# Altium PCB Input.PcbDoc
Units mm, origin at the board's own origin, x right, y up, seen from the top; angles counter-clockwise.
Board outline 40 x 40 mm, 2 copper layers (Top Layer, Bottom Layer); 2 components, 3 nets, 15 pads, 0 vias.
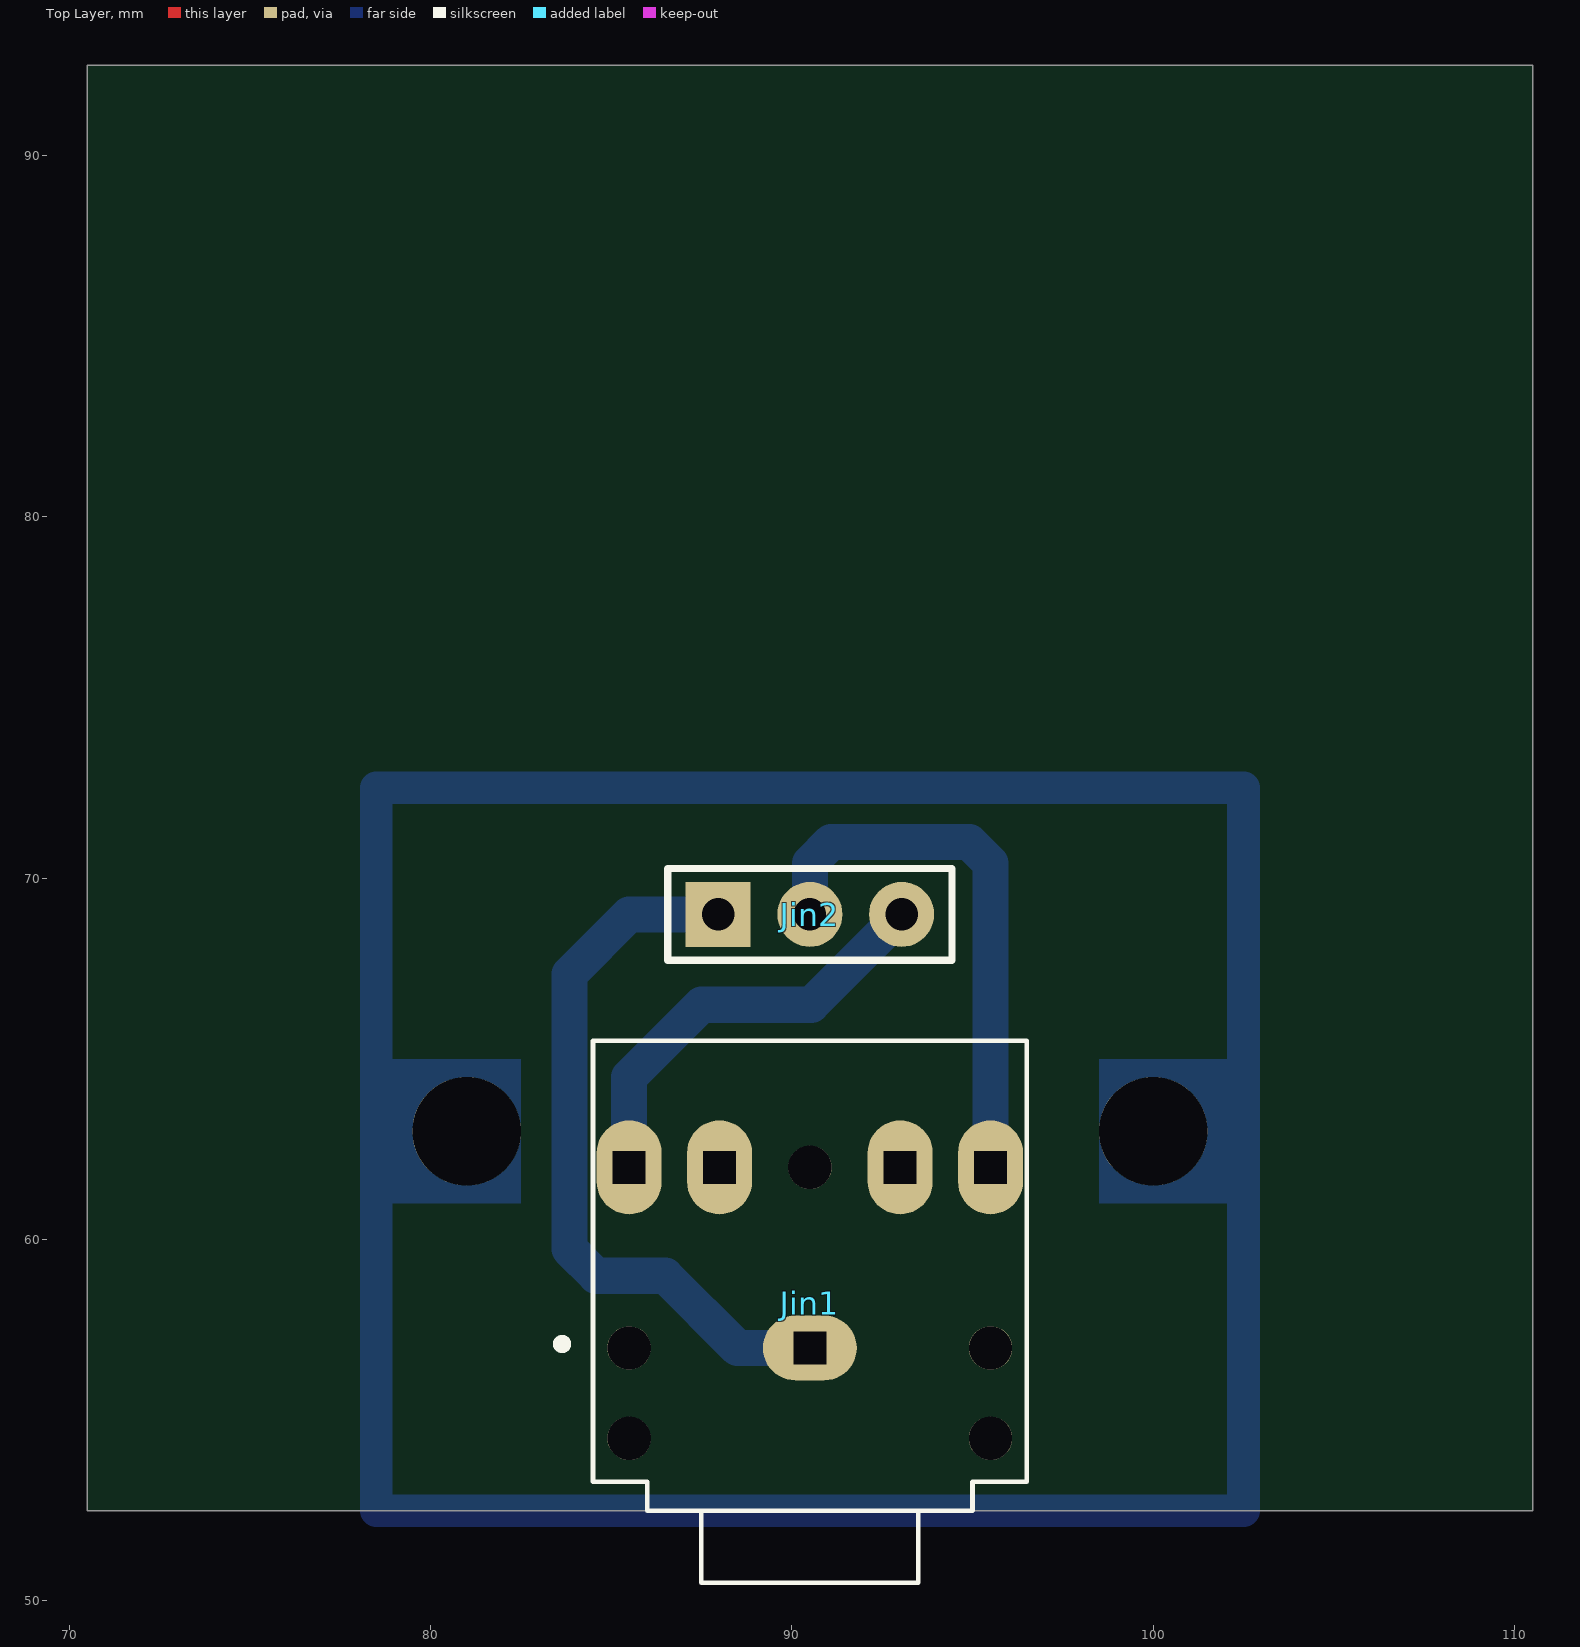
[diagram p0: Top Layer view]
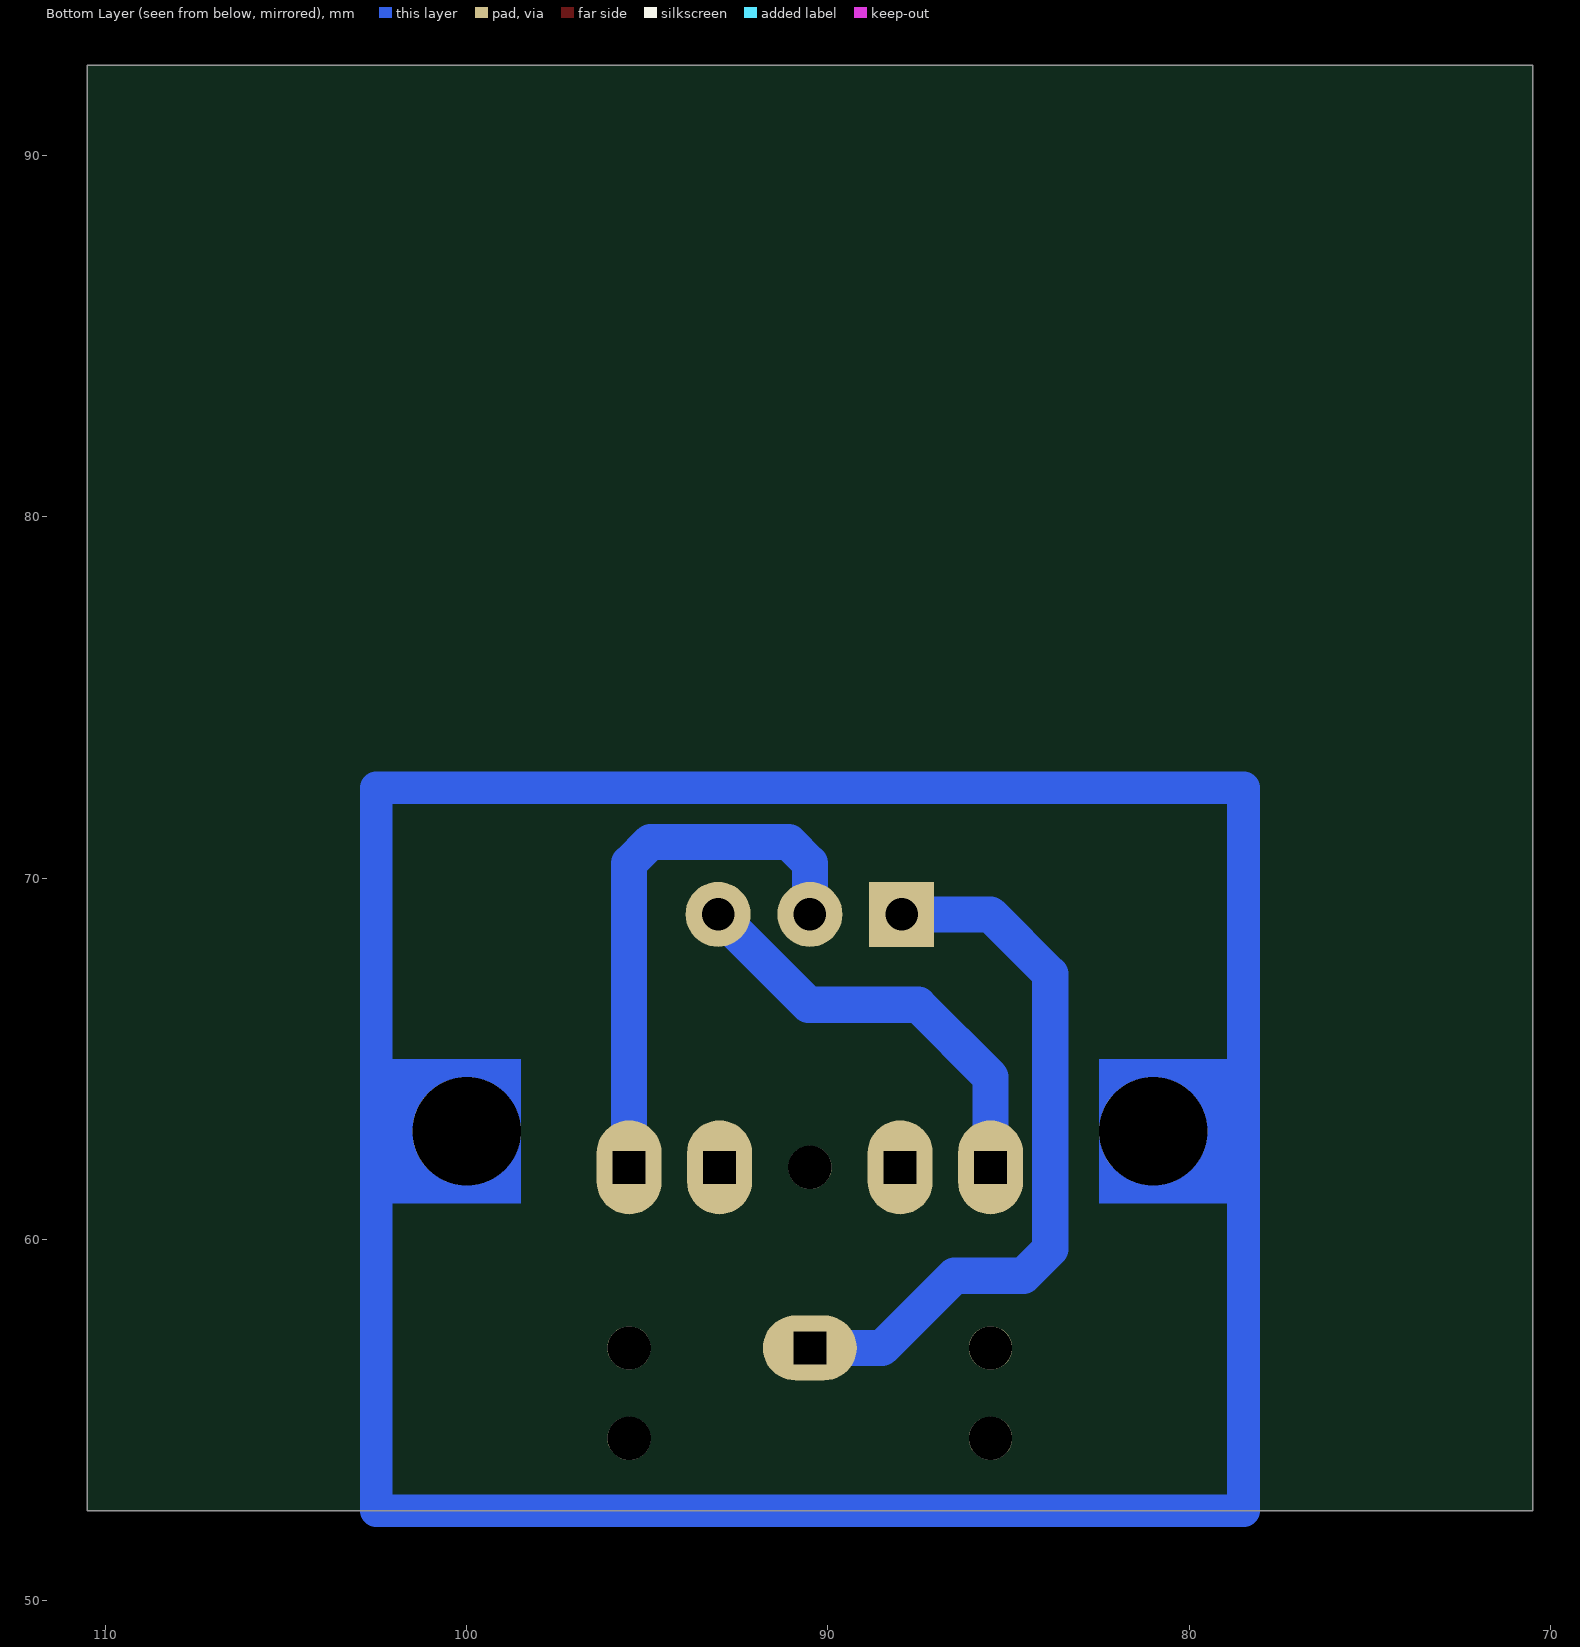
[diagram p1: Bottom Layer view, seen from below]

## Layer stack, top to bottom
Top Solder: solder mask 0.0102, Solder Resist, Dk 3.5
Top Layer: signal copper 0.0356
Dielectric 1: dielectric 0.32, FR-4, Dk 4.8
Bottom Layer: signal copper 0.0356
Bottom Solder: solder mask 0.0102, Solder Resist, Dk 3.5

## Board outline
70.5,52.5 110.5,52.5 110.5,92.5 70.5,92.5

## Design rules (kind name [scope] priority, off if disabled: settings)
Clearance [All] p1: gap=0.254 ignorepadtopadclearanceinfootprint=FALSE except(0: Arc-Hole Track-Hole SMDPad-Hole THPad-Hole Via-Hole Fill-Hole Poly-Hole Region-Hole Text-Hole)
PolygonConnect [All] p1: connectstyle=Relief reliefconductorwidth=0.254 reliefentries=4 polygonreliefangle="90 Angle" airgapwidth=0.254
RoutingVias [All] p1: holewidth=0.711 width=1.27 viastyle="Through Hole" minholewidth=0.711 minwidth=1.27 maxholewidth=0.711 maxwidth=1.27
SolderMaskExpansion [All] p1: expansion=0.102 istentingtop=FALSE
Width Width_1 [(InNet('NetJin1_1') AND InNet('NetJin1_2') AND InNet('NetJin1_3'))] p1: maxlimit=1 minlimit=1 preferedwidth=1
Width [All] p2: maxlimit=1 minlimit=0.254 preferedwidth=0.254
30 further rules are at their usual default settings.

## Components (designator, comment, footprint, x,y, rotation, side; value= is the part's Value field where it differs from the comment)
Jin1 "3.5mm JACK" SWITCHCRAFT_35RAPC4BHN2 90.5,58 r0 top
Jin2 "SIGNAL" SMTC-SLW-103-01-X-S 87.96,69 r0 top

## Footprints (in the part's own frame and the unit in brackets; to place one, negate y for a bottom-side part, rotate by r counter-clockwise, add the part's x,y. Pads: shape width x height; smd on the part's side, far side on the other; paste and mask are expansions set on the pad)
SMTC-SLW-103-01-X-S [mm] "Low Profile Socket Strip, 1x3 Pins, Vertical, 2.54mm Pitch, Female"
  rect 1.8x1.8 hole 0.9: 1(0,0)
  round 1.8 hole 0.9: 2(2.54,0) 3(5.08,0)
  silkscreen extent -1.4,-1.27 6.48,1.27, body extent -1.27,-1.27 6.35,1.27, height 4.57
SWITCHCRAFT_35RAPC4BHN2 [mm]
  oval 2.6x1.8 hole 0.9 square: 1(0,-1)
  oval 1.8x2.6 hole 0.9 square: 2(5,4) 3(-5,4) 10(2.5,4) 11(-2.5,4)
  round 1.2 hole 1.2 unplated: ""(-5,-3.5) ""(-5,-1) ""(0,4) ""(5,-3.5) ""(5,-1)
  silkscreen extent -6.96,-7.5 6,7.5, body extent -6,-7.5 6,7.5, height 5.58

## Part data
Jin1: library part 35RAPC4BHN2, "Conn 3.5MM Stereo Jack F 5 POS Solder RA Thru-Hole 5 Terminal 1 Port", Package=None, Availability=Unavailable, MF="{'manufacturer': u'Switchcraft Inc.'}", MP=35RAPC4BHN2, Price=None
Jin2: library part CMP-1023-00128-1, "Low Profile Socket Strips, Through-hole, Vertical, -55 to 125 degC, 2.54 mm Pitch, 3-Pin, Female, RoHS", Manufacturer=Samtec, PartNumber=SLW-103-01-G-S, Temperature Range="-55 to 125 degC", ComponentLink1Description="Manufacturer URL", ComponentLink1URL=http://www.samtec.com, ComponentLink2Description=Datasheet, ComponentLink2URL=http://www.samtec.com/documents/webfiles/pdf/SLW.PDF, ComponentLink3Description="Package Specification", ComponentLink3URL=http://www.samtec.com/documents/webfiles/cpdf/SLW-1XX-01-X-X-MKT.pdf, DatasheetVersion=F-214, Mounting Technology=Through-hole, Orientation=Vertical, PackageDescription="Low Profile Socket Strip", PackageReference=SLW-103-01-X-S, PackageVersion="X, 9/1987", Pitch="2.54 mm", RoHS=True

## Free pads (board coordinates)
  round 3 hole 3 unplated: 20(81,63) 21(100,63)

## Nets (pads, with @x,y where several pads share a name; then routed paths per layer and width w, separated by ;. In a path a pad name is that pad's centre, name@x,y a point inside that pad or via, vN(x,y) a via of type N, cw(c..) or ccw(c..) an arc to the next point about the centre after c; other vN are vias at no path point)
NetJin1_1: Jin1.1 Jin2.1 | length 20.2
  Bottom Layer w1: Jin2.1 85.5,69 83.846,67.346 83.846,59.74 84.586,59 86.5,59 88.5,57 Jin1.1
NetJin1_2: Jin1.2 Jin2.2 | length 15.3
  Bottom Layer w1: Jin2.2 90.5,70.414 91.086,71 94.914,71 95.5,70.414 Jin1.2
NetJin1_3: Jin1.3 Jin2.3 | length 11.9
  Bottom Layer w1: Jin1.3 85.5,64.5 87.5,66.5 90.54,66.5 Jin2.3
pads on no net: Jin1. Jin1.10 Jin1.11
copper on no net: | length 88
  Bottom Layer w0.9: 78.5,52.5 78.5,72.5 102.5,72.5 102.5,52.5 78.5,52.5

## Other copper
Bottom Layer:
  rectangle: 98.5,61 102.5,65
  rectangle: 78.5,61 82.5,65